# Altium PCB Generic_Axis_Channel_Blade.PcbDoc (part 1 of 3)
Units mm, origin at the board's own origin, x right, y up, seen from the top; angles counter-clockwise.
Board outline 87.5 x 97.62 mm, 4 copper layers (Top Layer 1, L2_GND, L3_PWR, Bottom Layer 1), stack 1.556 mm thick; 166 components, 595 nets, 662 pads, 1674 vias.
Unrouted connection lines stored in the file: 33.
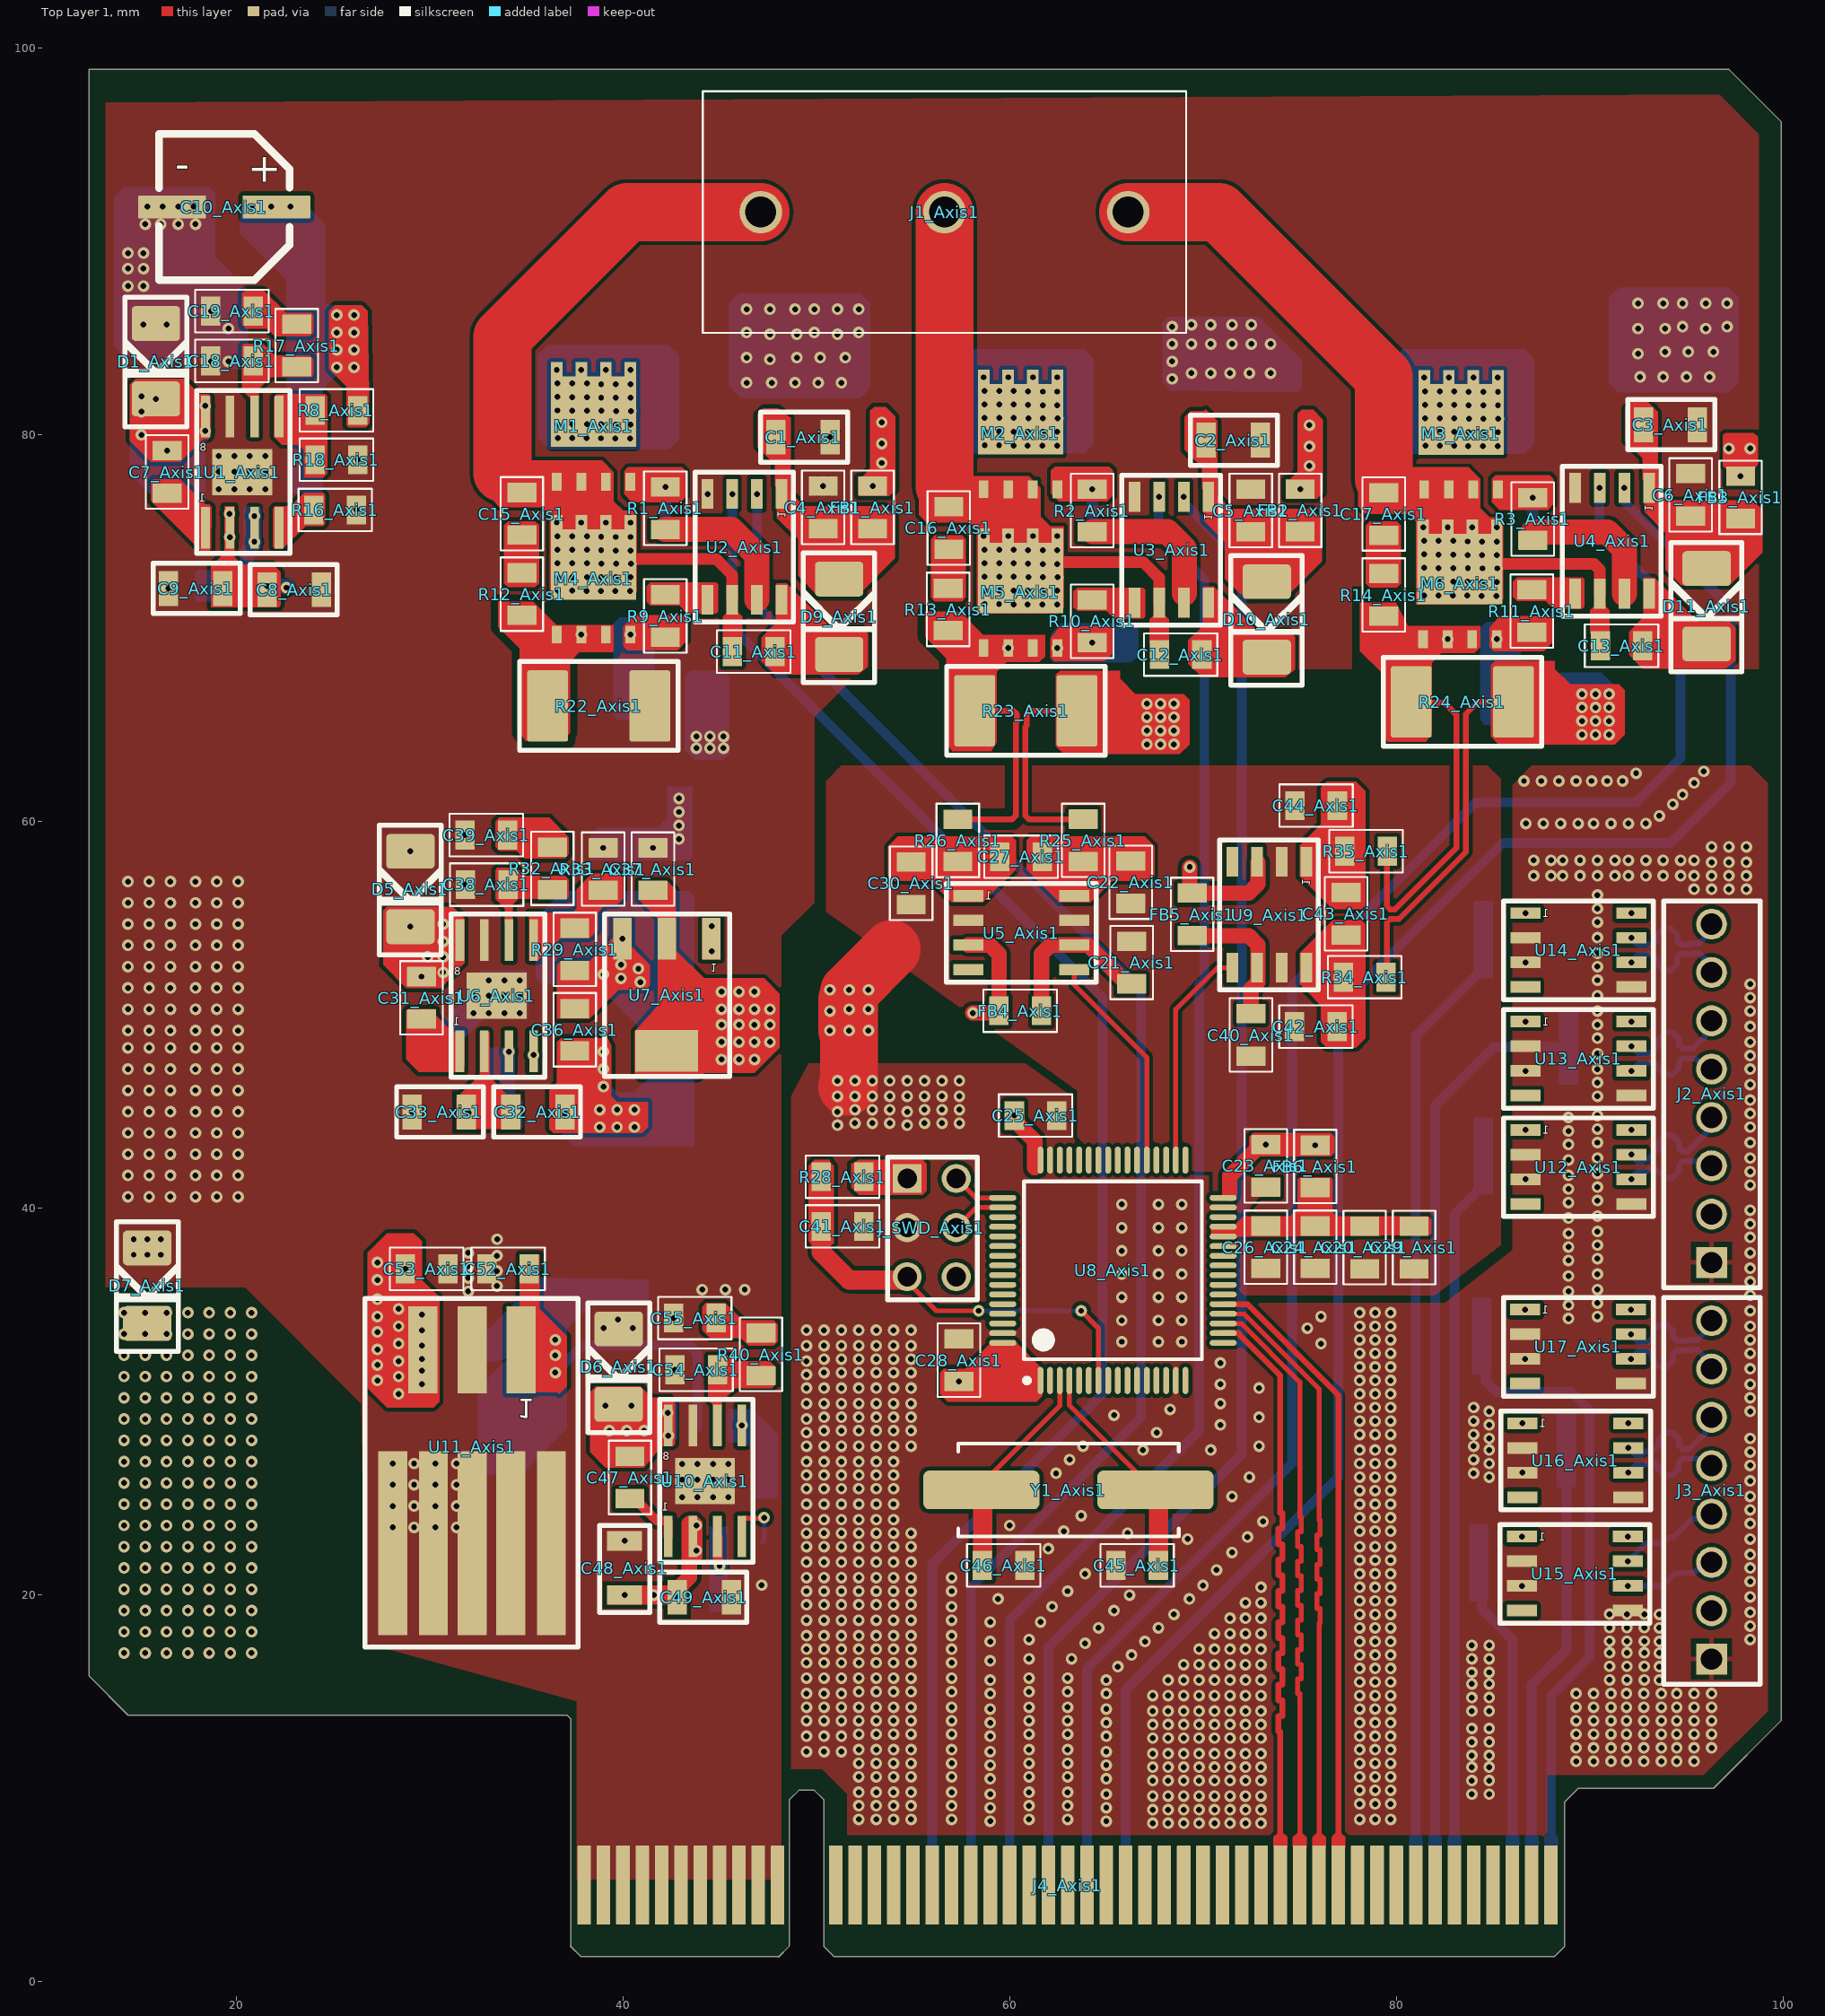
[diagram p0: Top Layer 1 view]
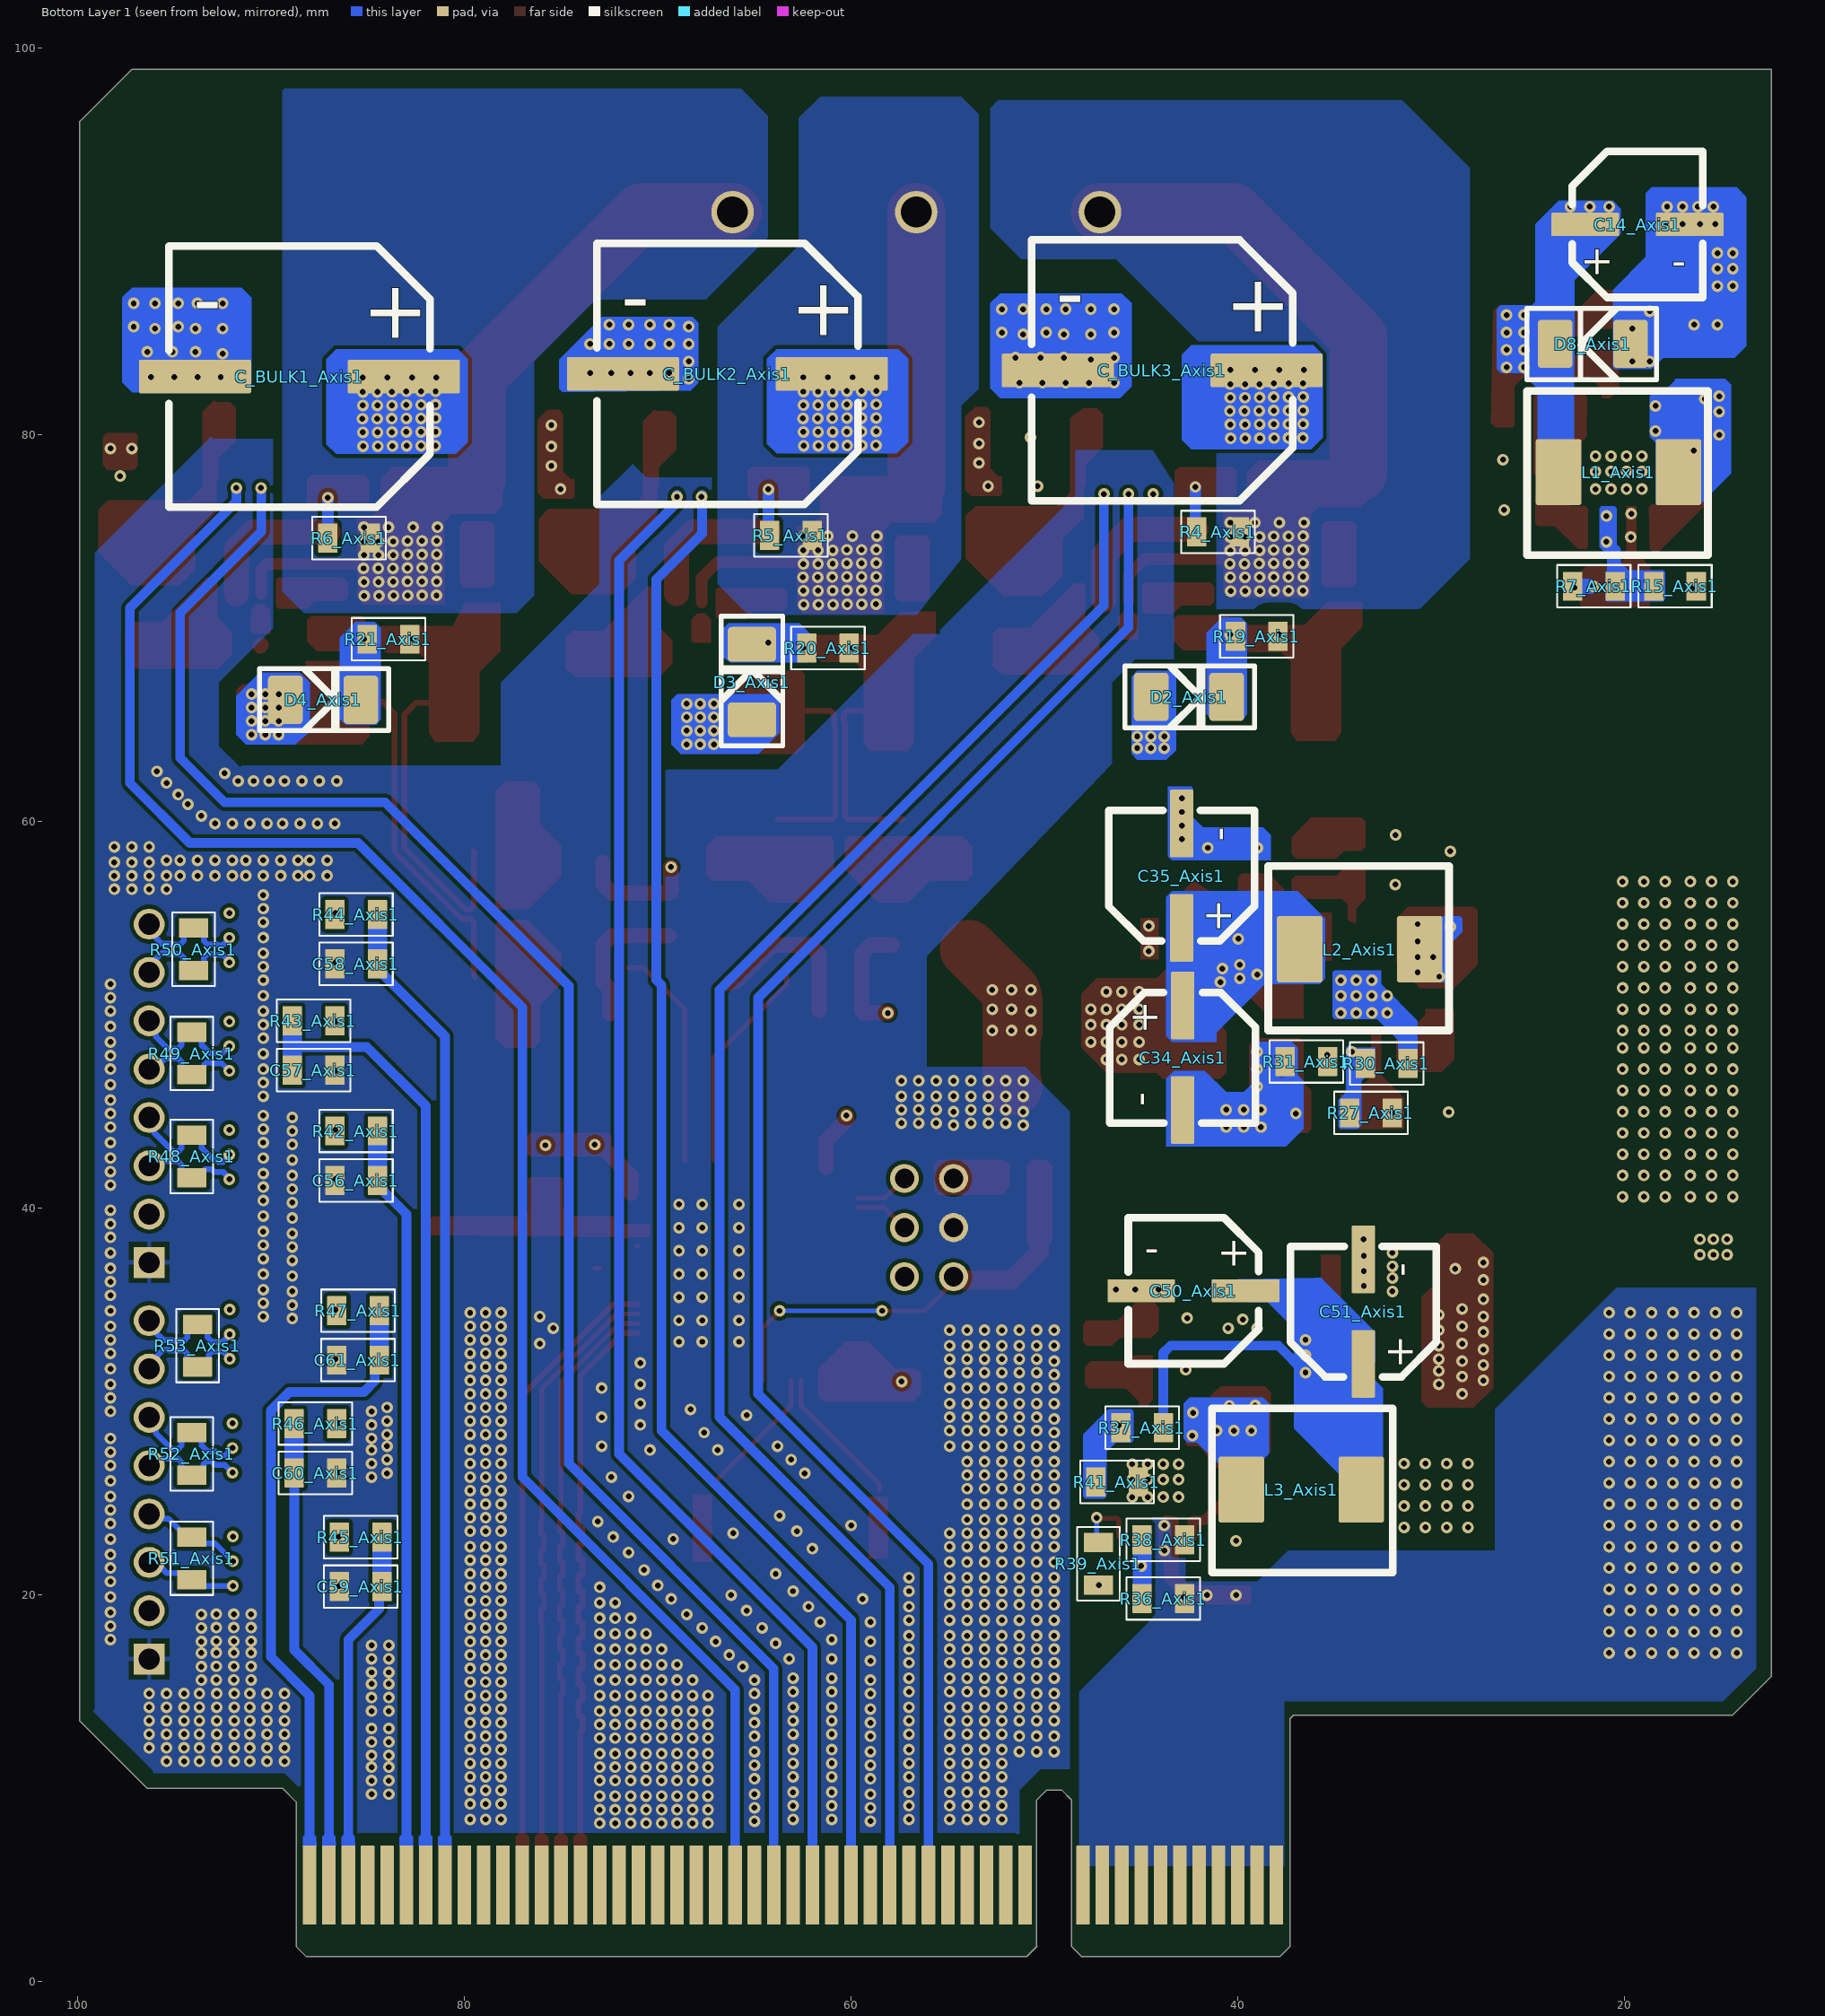
[diagram p1: Bottom Layer 1 view, seen from below]
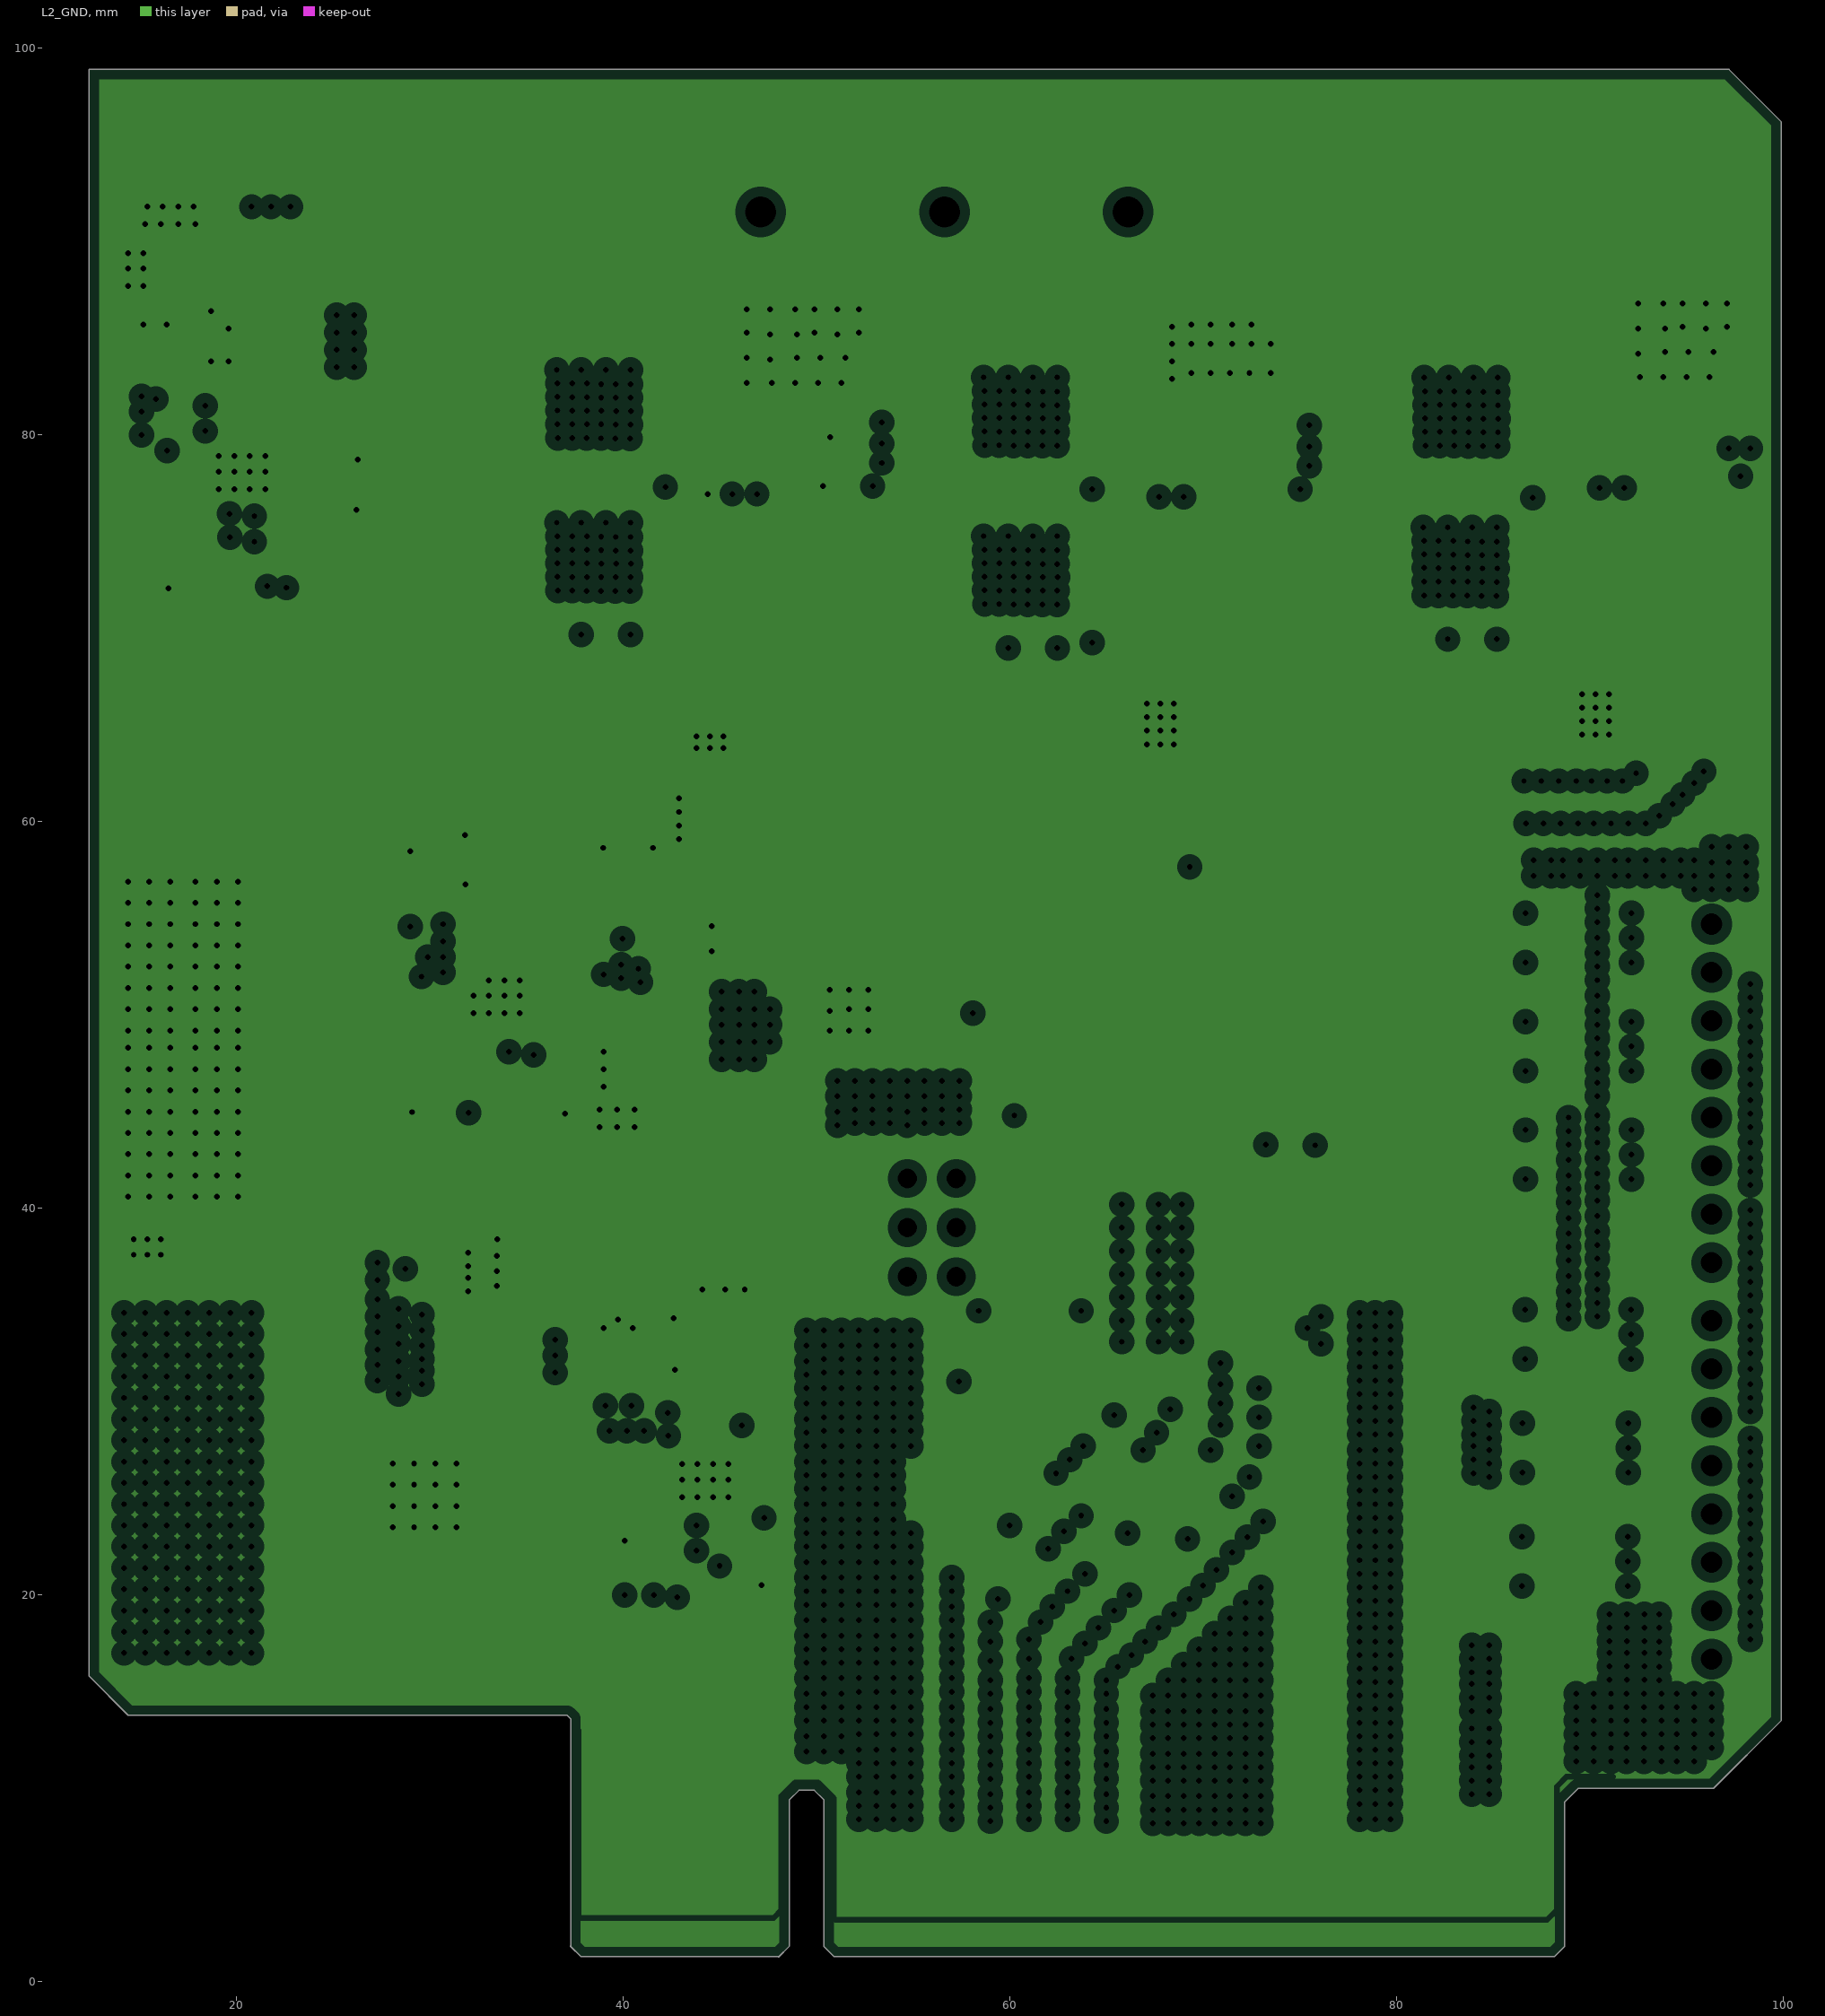
[diagram p2: L2_GND, clearances drawn from the general rule]
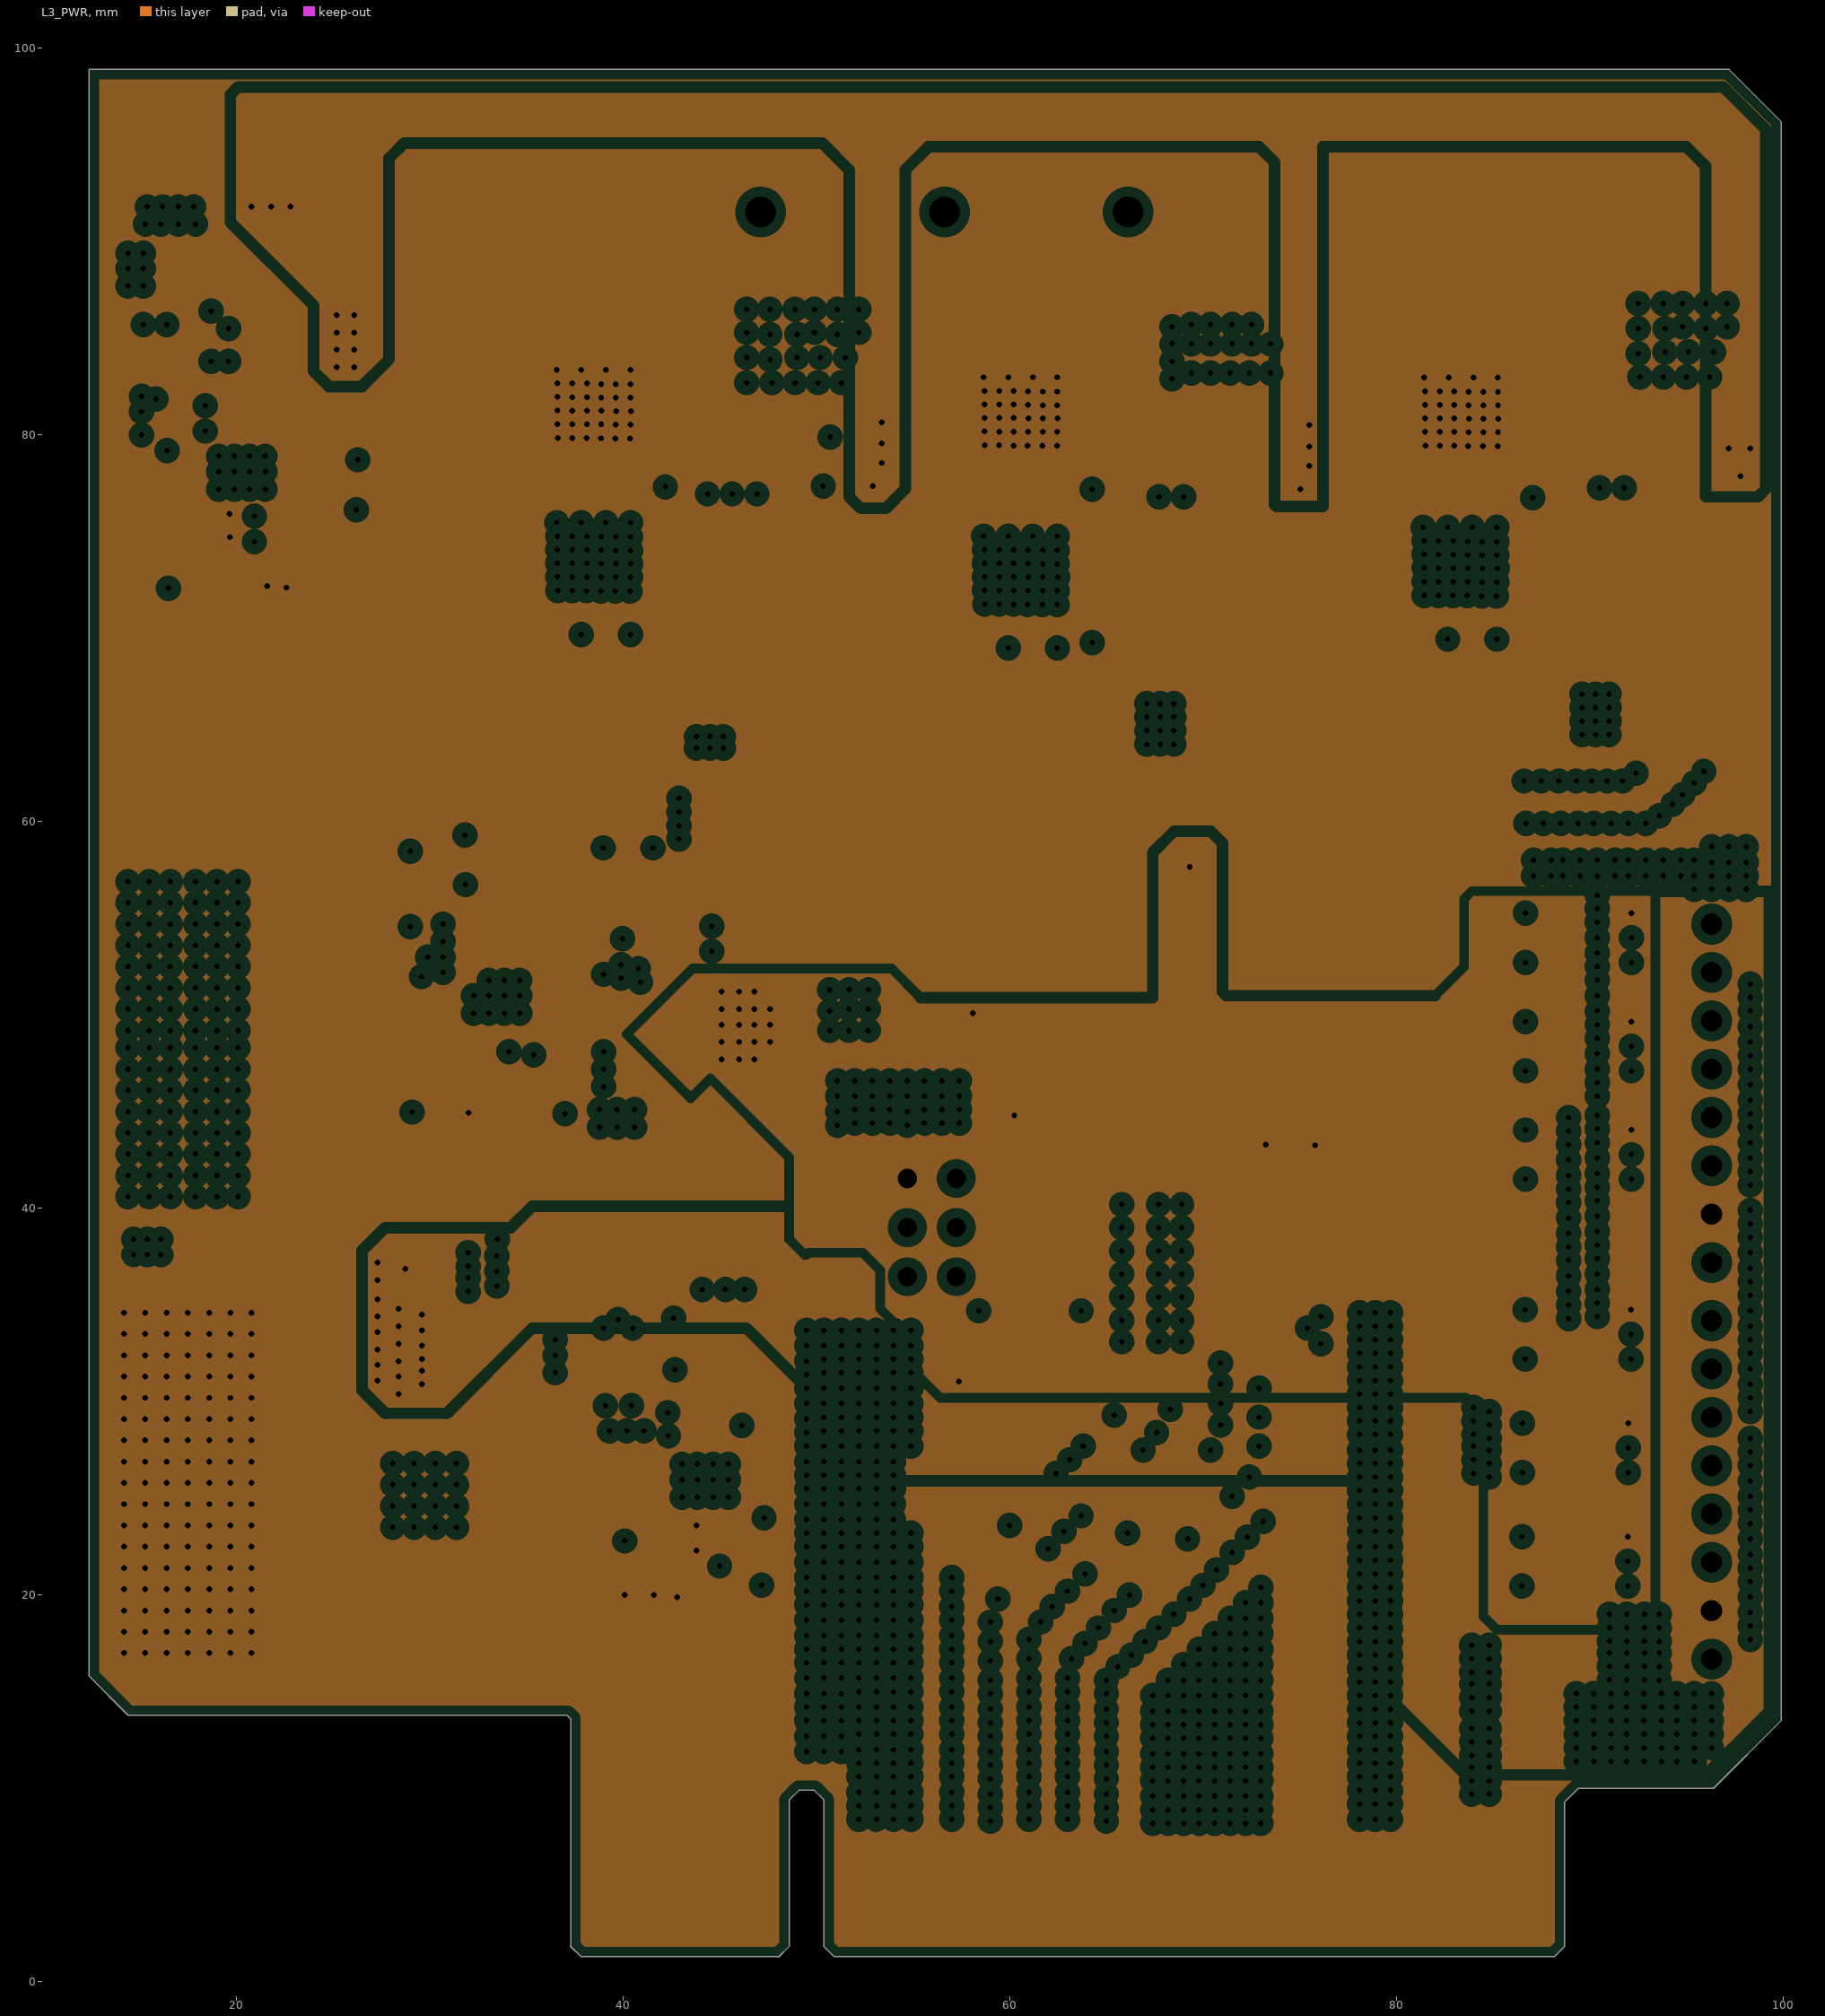
[diagram p3: L3_PWR, clearances drawn from the general rule]

## Layer stack, top to bottom
Top Solder: solder mask 0.0102, Solder Resist, Dk 3.5
Top Layer 1: signal copper 0.035
Dielectric 2: prepreg 0.1999, FR-4, Dk 4.2
L2_GND: plane copper 0.035, net AMP1 IN_Axis1_P
Dielectric 1: dielectric 1.016, FR-4, Dk 4.8
L3_PWR: plane copper 0.035, net (Multiple Nets)
Dielectric 3: prepreg 0.1999, FR-4, Dk 4.2
Bottom Layer 1: signal copper 0.035
Bottom Solder: solder mask 0.0102, Solder Resist, Dk 3.5

## Board outline
48.6,1.828 48.048,1.276 48.023,1.3 37.826,1.3 37.289,1.837 37.298,1.846 37.298,13.602 37.113,13.787 14.413,13.787 12.4,15.8 12.4,98.9 97.203,98.9 99.9,96.203 99.9,13.5 96.4,10 89.4,10 88.7,9.3 88.701,9.299 88.701,1.825 88.169,1.294 88.166,1.296 50.921,1.296 50.921,1.3 50.384,1.836 50.4,1.852 50.4,9.4 49.9,9.9 49.1,9.9 48.6,9.4

## Design rules (kind name [scope] priority, off if disabled: settings)
Clearance Clearance_Analog_vs_PowerOutput [InNetClass('ANALOG') vs InNetClass('POWER_OUTPUT')] p1: gap=1 ignorepadtopadclearanceinfootprint=FALSE
Clearance Clearance_PowerOutput_vs_Digital [InNetClass('POWER_OUTPUT') vs InNetClass('HIGH_SPEED')] p2: gap=0.5 ignorepadtopadclearanceinfootprint=FALSE
Clearance Clearance_Analog_Global [InNetClass('ANALOG') vs InNetClass('All Nets')] p3: gap=0.4 ignorepadtopadclearanceinfootprint=FALSE
Clearance Clearance_Global [All] p4: gap=0.2 ignorepadtopadclearanceinfootprint=FALSE
ComponentClearance [All] p1: gap=0.254 collisioncheckmode=3 verticalgap=0.3 showdistances=FALSE
DiffPairsRouting DiffPairs_Encoder [InDifferentialPairClass('All Differential Pairs')] p1: maxlimit=0.3 minlimit=0.15 mostfreqgap=0.2 toplayer_minwidth=0.15 toplayer_maxwidth=0.3 toplayer_prefwidth=0.2 bottomlayer_minwidth=0.15 bottomlayer_maxwidth=0.3 bottomlayer_prefwidth=0.2 maxuncoupledlength=12.7
MatchedLengths MatchedLength_SPI [InNetClass('SPI')] p1: tolerance=2 checknetsindiffpair=FALSE checkdiffpairvsdiffpair=TRUE checkxsignals=TRUE checkothers=TRUE
PlaneClearance [All] p1: clearance=0.508
PlaneConnect "Termal vias" [All] p1: pad.planeconnectstyle=Relief pad.reliefexpansion=0.508 pad.reliefentries=4 pad.reliefconductorwidth=0.254 pad.reliefairgap=0.254 via.planeconnectstyle=Direct via.reliefexpansion=0.508 via.reliefentries=4 via.reliefconductorwidth=0.254 via.reliefairgap=0.254
PolygonConnect GND [InNet('DGND')] p1: connectstyle=Direct reliefconductorwidth=0.254 reliefentries=4 polygonreliefangle="90 Angle" airgapwidth=0.254
PolygonConnect PolyConnect_SuperSO8 [HasFootprint('SuperSO8')] p2: connectstyle=Direct reliefconductorwidth=0.254 reliefentries=4 polygonreliefangle="90 Angle" airgapwidth=0.254
PolygonConnect PolyConnect_HSOIC-8-DDA [HasFootprint('HSOIC-8-DDA')] p3: connectstyle=Direct reliefconductorwidth=0.254 reliefentries=4 polygonreliefangle="90 Angle" airgapwidth=0.254
PolygonConnect PolyConnect_SOIC-8_PAD [HasFootprint('SOIC-8_PowerPAD_DDA')] p4: connectstyle=Direct reliefconductorwidth=0.254 reliefentries=4 polygonreliefangle="90 Angle" airgapwidth=0.254
PolygonConnect PolyConnect_Relief [All] p5: connectstyle=Relief reliefconductorwidth=0.5 reliefentries=4 polygonreliefangle="90 Angle" airgapwidth=0.3
RoutingVias Via_Power [InNetClass('POWER')] p1: holewidth=0.5 width=1 viastyle="Through Hole" minholewidth=0.4 minwidth=0.8 maxholewidth=0.8 maxwidth=1.5
RoutingVias Via_Power_Output [InNetClass('POWER_OUTPUT')] p2: holewidth=0.5 width=1 viastyle="Through Hole" minholewidth=0.4 minwidth=0.8 maxholewidth=0.8 maxwidth=1.5
RoutingVias Via_Signal [All] p3: holewidth=0.3 width=0.6 viastyle="Through Hole" minholewidth=0.25 minwidth=0.5 maxholewidth=0.5 maxwidth=1
SolderMaskExpansion [All] p1: expansion=0.102 istentingtop=FALSE
SupplyNets "Schematic Supply Nets_11" [InNet('AMP1 IN_Axis1_P')] p1: voltage=0.000
SupplyNets "Schematic Supply Nets_3" [InNet('MAIN VCC')] p2: voltage=0.000
SupplyNets "Schematic Supply Nets_5" [InNet('DGND')] p3: voltage=0.000
SupplyNets "Schematic Supply Nets_6" [InNet('AGND')] p4: voltage=0.000
SupplyNets "Schematic Supply Nets_4" [InNet('+3.3')] p5: voltage=0.000
SupplyNets "Schematic Supply Nets_1" [InNet('+12')] p6: voltage=0.000
SupplyNets "Schematic Supply Nets" [InNet('+5')] p7: voltage=0.000
Width Width_Power_Output [InNetClass('POWER_OUTPUT')] p1: maxlimit=5 minlimit=1.5 preferedwidth=2
Width Width_Power [InNetClass('POWER')] p2: maxlimit=3 minlimit=0.8 preferedwidth=1.5
Width Width_Analog [InNetClass('ANALOG')] p3: maxlimit=0.8 minlimit=0.25 preferedwidth=0.4
Width Width_Digital [InNetClass('HIGH_SPEED')] p4: maxlimit=0.5 minlimit=0.15 preferedwidth=0.2
26 further rules are at their usual default settings.

## Classes and differential pairs
net class SPI: CS_Axis1 CS_Axis2 CS_Axis3 CS_Axis4 CS_Axis5 CS_Axis6 MISO_Axis1 MISO_Axis2 MISO_Axis3 MISO_Axis4 MISO_Axis5 MISO_Axis6 MOSI_Axis1 MOSI_Axis2 MOSI_Axis3 MOSI_Axis4 MOSI_Axis5 MOSI_Axis6 NetJ_SWD_Axis1_2 NetJ_SWD_Axis1_4 SCK_Axis1 SCK_Axis2 SCK_Axis3 SCK_Axis4 SCK_Axis5 SCK_Axis6
net class POWER_OUTPUT: Va_Axis1 Va_Axis2 Va_Axis3 Va_Axis4 Va_Axis5 Va_Axis6 Vb_Axis1 Vb_Axis2 Vb_Axis3 Vb_Axis4 Vb_Axis5 Vb_Axis6 Vc_Axis1 Vc_Axis2 Vc_Axis3 Vc_Axis4 Vc_Axis5 Vc_Axis6
net class ANALOG: "AMP1 IN_Axis1_N" NetM4_Axis1_1
net class HIGH_SPEED: A1_Axis1 A1_Axis2 A1_Axis3 A1_Axis4 A1_Axis5 A1_Axis6 A2_Axis1 A2_Axis2 A2_Axis3 A2_Axis4 A2_Axis5 A2_Axis6 B1_Axis1 B1_Axis2 B1_Axis3 B1_Axis4 B1_Axis5 B1_Axis6 B2_Axis1 B2_Axis2 B2_Axis3 B2_Axis4 B2_Axis5 B2_Axis6 MISO_Axis1 MISO_Axis2 MISO_Axis3 MISO_Axis4 MISO_Axis5 MISO_Axis6 MOSI_Axis1 MOSI_Axis2 MOSI_Axis3 MOSI_Axis4 MOSI_Axis5 MOSI_Axis6 NetJ_SWD_Axis1_2 NetJ_SWD_Axis1_4 "PWM AH_Axis1" "PWM AH_Axis2" "PWM AH_Axis3" "PWM AH_Axis4" "PWM AH_Axis5" "PWM AH_Axis6" "PWM AL_Axis1" "PWM AL_Axis2" "PWM AL_Axis3" "PWM AL_Axis4" "PWM AL_Axis5" "PWM AL_Axis6" "PWM BH_Axis1" "PWM BH_Axis2" "PWM BH_Axis3" "PWM BH_Axis4" "PWM BH_Axis5" "PWM BH_Axis6" "PWM BL_Axis1" "PWM BL_Axis2" "PWM BL_Axis3" "PWM BL_Axis4" "PWM BL_Axis5" "PWM BL_Axis6" "PWM CH_Axis1" "PWM CH_Axis2" "PWM CH_Axis3" "PWM CH_Axis4" "PWM CH_Axis5" "PWM CH_Axis6" "PWM CL_Axis1" "PWM CL_Axis2" "PWM CL_Axis3" "PWM CL_Axis4" "PWM CL_Axis5" "PWM CL_Axis6" SCK_Axis1 SCK_Axis2 SCK_Axis3 SCK_Axis4 SCK_Axis5 SCK_Axis6 Z1_Axis1 Z1_Axis2 Z1_Axis3 Z1_Axis4 Z1_Axis5 Z1_Axis6 Z2_Axis1 Z2_Axis2 Z2_Axis3 Z2_Axis4 Z2_Axis5 Z2_Axis6
net class POWER: +3.3 +5 +12 "MAIN VCC"
channel class Axis_Channel: Axis1 Axis2 Axis3 Axis4 Axis5 Axis6
component class Axis6: C_BULK?_Axis6
component class Axis5: C_BULK?_Axis5
component class Axis4: C_BULK?_Axis4
component class Axis3: C_BULK?_Axis3
component class Axis2: C_BULK?_Axis2
differential pair Z2_Axis6: +Z2_Axis6_P -Z2_Axis6_N
differential pair Z2_Axis5: +Z2_Axis5_P -Z2_Axis5_N
differential pair Z2_Axis4: +Z2_Axis4_P -Z2_Axis4_N
differential pair Z2_Axis3: +Z2_Axis3_P -Z2_Axis3_N
differential pair Z2_Axis2: +Z2_Axis2_P -Z2_Axis2_N
differential pair Z2_Axis1: +Z2_Axis1_P -Z2_Axis1_N
differential pair Z1_Axis6: +Z1_Axis6_P -Z1_Axis6_N
differential pair Z1_Axis5: +Z1_Axis5_P -Z1_Axis5_N
differential pair Z1_Axis4: +Z1_Axis4_P -Z1_Axis4_N
differential pair Z1_Axis3: +Z1_Axis3_P -Z1_Axis3_N
differential pair Z1_Axis2: +Z1_Axis2_P -Z1_Axis2_N
differential pair Z1_Axis1: +Z1_Axis1_P -Z1_Axis1_N
differential pair B2_Axis6: +B2_Axis6_P -B2_Axis6_N
differential pair B2_Axis5: +B2_Axis5_P -B2_Axis5_N
differential pair B2_Axis4: +B2_Axis4_P -B2_Axis4_N
differential pair B2_Axis3: +B2_Axis3_P -B2_Axis3_N
differential pair B2_Axis2: +B2_Axis2_P -B2_Axis2_N
differential pair B2_Axis1: +B2_Axis1_P -B2_Axis1_N
differential pair B1_Axis6: +B1_Axis6_P -B1_Axis6_N
differential pair B1_Axis5: +B1_Axis5_P -B1_Axis5_N
differential pair B1_Axis4: +B1_Axis4_P -B1_Axis4_N
differential pair B1_Axis3: +B1_Axis3_P -B1_Axis3_N
differential pair B1_Axis2: +B1_Axis2_P -B1_Axis2_N
differential pair B1_Axis1: +B1_Axis1_P -B1_Axis1_N
differential pair A2_Axis6: +A2_Axis6_P -A2_Axis6_N
differential pair A2_Axis5: +A2_Axis5_P -A2_Axis5_N
differential pair A2_Axis4: +A2_Axis4_P -A2_Axis4_N
differential pair A2_Axis3: +A2_Axis3_P -A2_Axis3_N
differential pair A2_Axis2: +A2_Axis2_P -A2_Axis2_N
differential pair A2_Axis1: +A2_Axis1_P -A2_Axis1_N
differential pair A1_Axis6: +A1_Axis6_P -A1_Axis6_N
differential pair A1_Axis5: +A1_Axis5_P -A1_Axis5_N
differential pair A1_Axis4: +A1_Axis4_P -A1_Axis4_N
differential pair A1_Axis3: +A1_Axis3_P -A1_Axis3_N
differential pair A1_Axis2: +A1_Axis2_P -A1_Axis2_N
differential pair A1_Axis1: +A1_Axis1_P -A1_Axis1_N

## Components (designator, comment, footprint, x,y, rotation, side; value= is the part's Value field where it differs from the comment)
C1_Axis1 "Capacitor 1206" 1206 49.32,79.882 r0 top value=4.7u (schematic designator C1)
C2_Axis1 "Capacitor 1206" 1206 71.559,79.731 r0 top value=4.7u (schematic designator C2)
C3_Axis1 "Capacitor 1206" 1206 94.173,80.526 r0 top value=4.7u (schematic designator C3)
C4_Axis1 "Capacitor 0805" 0805 50.358,76.249 r90 top value=100n (schematic designator C4)
C5_Axis1 "Capacitor 0805" 0805 72.47,76.09 r90 top value=100n (schematic designator C5)
C6_Axis1 "Capacitor 0805" 0805 95.22,76.895 r90 top value=100n (schematic designator C6)
C7_Axis1 "Alum SMD Cap" 0805 16.427,78.083 r270 top value=0.1u (schematic designator C7)
C8_Axis1 "Alum SMD Cap" 1206 23.011,71.996 r180 top value=2.2u (schematic designator C8)
C9_Axis1 "Capacitor 1206" 1206 17.903,72.058 r0 top value=2.2u (schematic designator C9)
C10_Axis1 "Alum SMD Cap" "ECAP D6.3xL7.7mm" 19.379,91.787 r180 top value=47u (schematic designator C10)
C11_Axis1 "Capacitor 0805" 0805 46.765,68.791 r0 top value=220n (schematic designator C11)
C12_Axis1 "Capacitor 0805" 0805 68.841,68.642 r0 top value=220n (schematic designator C12)
C13_Axis1 "Capacitor 0805" 0805 91.646,69.101 r0 top value=220n (schematic designator C13)
C14_Axis1 "Alum SMD Cap" "ECAP D6.3xL7.7mm" 19.329,90.888 r180 bottom value=47u (schematic designator C14)
C15_Axis1 "Capacitor 0805" 0805 34.773,75.919 r270 top value=1n (schematic designator C15)
C16_Axis1 "Capacitor 0805" 0805 56.852,75.191 r270 top value=1n (schematic designator C16)
C17_Axis1 "Capacitor 0805" 0805 79.345,75.911 r270 top value=1n (schematic designator C17)
C18_Axis1 "Capacitor" 0805 19.78,83.823 r180 top value=39p (schematic designator C18)
C19_Axis1 "Capacitor 0805" 0805 19.78,86.408 r180 top value=6800p (schematic designator C19)
C20_Axis1 "Capacitor 0805" 0805 78.361,37.973 r270 top value=100n (schematic designator C20)
C21_Axis1 "Cap" 0805 66.304,52.713 r90 top (schematic designator C21)
C22_Axis1 "Cap" 0805 66.269,56.867 r270 top (schematic designator C22)
C23_Axis1 "Capacitor 0805" 0805 73.253,42.195 r90 top value=100n (schematic designator C23)
C24_Axis1 "Capacitor 0805" 0805 75.807,37.985 r90 top value=1u (schematic designator C24)
C25_Axis1 "Capacitor 0805" 0805 61.343,44.795 r180 top value=100n (schematic designator C25)
C26_Axis1 "Capacitor 0805" 0805 73.253,37.985 r270 top value=1u (schematic designator C26)
C27_Axis1 "Cap" 0805 60.592,58.182 r0 top (schematic designator C27)
C28_Axis1 "Capacitor 0805" 0805 57.381,32.144 r270 top value=100n (schematic designator C28)
C29_Axis1 "Capacitor 0805" 0805 80.915,37.976 r270 top value=100n (schematic designator C29)
C30_Axis1 "Cap" 0805 54.908,56.815 r90 top (schematic designator C30)
C31_Axis1 "Alum SMD Cap" 0805 29.586,50.885 r270 top value=0.1u (schematic designator C31)
C32_Axis1 "Alum SMD Cap" 1206 35.608,44.979 r180 top value=2.2u (schematic designator C32)
C33_Axis1 "Capacitor 1206" 1206 30.495,44.979 r0 top value=2.2u (schematic designator C33)
C34_Axis1 "Alum SMD Cap" "ECAP D6.3xL7.7mm" 42.854,47.789 r270 bottom value=47u (schematic designator C34)
C35_Axis1 "Alum SMD Cap" "ECAP D6.3xL7.7mm" 42.904,57.202 r90 bottom value=47u (schematic designator C35)
C36_Axis1 "Capacitor 0805" 0805 37.509,49.236 r90 top value=0.33u (schematic designator C36)
C37_Axis1 "Capacitor 0805" 0805 41.55,57.544 r270 top value=1u (schematic designator C37)
C38_Axis1 "SMD Cap" 0805 32.952,56.743 r180 top value=39p (schematic designator C38)
C39_Axis1 "Capacitor 0805" 0805 32.94,59.309 r180 top value=6800p (schematic designator C39)
C40_Axis1 "Cap" 0805 72.482,48.967 r270 top (schematic designator C40)
C41_Axis1 "Capacitor 0805" 0805 51.361,39.065 r180 top value=100n (schematic designator C41)
C42_Axis1 "Cap" 0805 75.841,49.402 r180 top value=33p (schematic designator C42)
C43_Axis1 "Cap" 0805 77.402,55.234 r270 top (schematic designator C43)
C44_Axis1 "Cap" 0805 75.848,60.826 r0 top (schematic designator C44)
C45_Axis1 "Capacitor 0805" 0805 66.591,21.53 r0 top value=22p (schematic designator C45)
C46_Axis1 "Capacitor 0805" 0805 59.692,21.53 r180 top value=22p (schematic designator C46)
C47_Axis1 "Alum SMD Cap" 0805 40.363,26.081 r270 top value=0.1u (schematic designator C47)
C48_Axis1 "Alum SMD Cap" 1206 40.086,21.399 r270 top value=2.2u (schematic designator C48)
C49_Axis1 "Capacitor 1206" 1206 44.208,19.884 r180 top value=2.2u (schematic designator C49)
C50_Axis1 "Alum SMD Cap" "ECAP D6.3xL7.7mm" 42.29,35.736 r0 bottom value=47u (schematic designator C50)
C51_Axis1 "Alum SMD Cap" "ECAP D6.3xL7.7mm" 33.51,34.66 r90 bottom value=47u (schematic designator C51)
C52_Axis1 "Capacitor 0805" 0805 34.061,36.872 r0 top value=0.33u (schematic designator C52)
C53_Axis1 "Capacitor 0805" 0805 29.853,36.872 r180 top value=1u (schematic designator C53)
C54_Axis1 "Alum SMD Cap" 0805 43.786,31.648 r180 top value=39p (schematic designator C54)
C55_Axis1 "Capacitor 0805" 0805 43.717,34.326 r180 top value=6800p (schematic designator C55)
C56_Axis1 "Capacitor 0805" 0805 85.6,41.446 r180 bottom value=33p (schematic designator C56)
C57_Axis1 "Capacitor 0805" 0805 87.8,47.146 r0 bottom value=33p (schematic designator C57)
C58_Axis1 "Capacitor 0805" 0805 85.6,52.646 r180 bottom value=33p (schematic designator C58)
C59_Axis1 "Capacitor 0805" 0805 85.366,20.437 r180 bottom value=33p (schematic designator C59)
C60_Axis1 "Capacitor 0805" 0805 87.7,26.317 r0 bottom value=33p (schematic designator C60)
C61_Axis1 "Capacitor 0805" 0805 85.501,32.151 r180 bottom value=33p (schematic designator C61)
C_BULK1_Axis1 "Alum SMD Cap" "ECAP 12.5x16.5" 88.529,83.023 r0 bottom value=220u (schematic designator C_BULK1)
C_BULK2_Axis1 "Alum SMD Cap" "ECAP 12.5x16.5" 66.399,83.161 r0 bottom value=220u (schematic designator C_BULK2)
C_BULK3_Axis1 "Alum SMD Cap" "ECAP 12.5x16.5" 43.907,83.336 r0 bottom value=220u (schematic designator C_BULK3)
D1_Axis1 "Schottky Diod" SMB 15.849,83.814 r270 top value=5V (schematic designator D1)
D2_Axis1 "Supressor Dual" SMB 42.53,66.451 r180 bottom (schematic designator D2)
D3_Axis1 "Supressor Dual" SMB 65.128,67.222 r90 bottom (schematic designator D3)
D4_Axis1 "Supressor Dual" SMB 87.302,66.304 r180 bottom (schematic designator D4)
D5_Axis1 "Schottky Diod" SMB 29.009,56.516 r270 top value=5V (schematic designator D5)
D6_Axis1 "Schottky Diod" SMB 39.786,31.812 r270 top value=5V (schematic designator D6)
D7_Axis1 "Supressor Dual" SMB 15.4,36 r270 top (schematic designator D7)
D8_Axis1 "Supressor Dual" SMB 21.639,84.707 r0 bottom (schematic designator D8)
D9_Axis1 "Schottky Diod" SMB 51.185,70.596 r270 top value=12V (schematic designator D9)
D10_Axis1 "Schottky Diod" SMB 73.297,70.459 r270 top value=12V (schematic designator D10)
D11_Axis1 "Schottky Diod" SMB 96.047,71.143 r270 top value=12V (schematic designator D11)
FB1_Axis1 "Ferrite Bead" 0805 52.913,76.249 r90 top value=1K (schematic designator FB1)
FB2_Axis1 "Ferrite Bead" 0805 75.024,76.1 r90 top value=1K (schematic designator FB2)
FB3_Axis1 "Ferrite Bead" 0805 97.803,76.774 r90 top value=1K (schematic designator FB3)
FB4_Axis1 "Ferrite Bead" 0805 60.548,50.22 r180 top value=1K (schematic designator FB4)
FB5_Axis1 "Ferrite Bead" 0805 69.435,55.202 r90 top value=1K (schematic designator FB5)
FB6_Axis1 "Ferrite Bead" 0805 75.807,42.162 r270 top value=1K (schematic designator FB6)
J1_Axis1 "DG950-9.5-03P-14" DG950-9.5-03P-14 56.629,91.523 r0 top (schematic designator J1)
J2_Axis1 "JST/MOLEX_8pin" B8B-EH-A-(LF)(SN) 96.324,45.893 r90 top (schematic designator J2)
J3_Axis1 "JST/MOLEX_8pin" B8B-EH-A-(LF)(SN) 96.324,25.385 r90 top (schematic designator J3)
J4_Axis1 "PCIe x8 Edge Connector" MALE_PCI_x8 52.65,2.25 r0 top (schematic designator J4)
J_SWD_Axis1 "HEADER_2x3" HEADER_2x3 56.029,38.589 r0 top (schematic designator J_SWD)
L1_Axis1 "Inductor" MWSA0603S-4R7MT 20.313,78.076 r0 bottom value=4.7u (schematic designator L1)
L2_Axis1 "Inductor" MWSA0603S-4R7MT 33.7,53.4 r0 bottom value=4.7u (schematic designator L2)
L3_Axis1 "Inductor" MWSA0603S-4R7MT 36.718,25.454 r180 bottom value=4.7u (schematic designator L3)
M1_Axis1 "NTMFS3D5N08XT1G" SuperSO8 38.483,80.507 r0 top (schematic designator M1)
M2_Axis1 "NTMFS3D5N08XT1G" SuperSO8 60.562,80.121 r0 top (schematic designator M2)
M3_Axis1 "NTMFS3D5N08XT1G" SuperSO8 83.347,80.103 r0 top (schematic designator M3)
M4_Axis1 "NTMFS3D5N08XT1G" SuperSO8 38.483,72.605 r0 top (schematic designator M4)
M5_Axis1 "NTMFS3D5N08XT1G" SuperSO8 60.562,71.909 r0 top (schematic designator M5)
M6_Axis1 "NTMFS3D5N08XT1G" SuperSO8 83.289,72.365 r0 top (schematic designator M6)
R1_Axis1 "Resistor 0805" 0805 42.194,76.209 r270 top value=20 (schematic designator R1)
R2_Axis1 "Resistor 0805" 0805 64.273,76.09 r270 top value=20 (schematic designator R2)
R3_Axis1 "Resistor 0805" 0805 87.058,75.651 r90 top value=20 (schematic designator R3)
R4_Axis1 "Resistor 0805" 0805 41.02,74.982 r0 bottom value=100K (schematic designator R4)
R5_Axis1 "Resistor 0805" 0805 63.116,74.807 r0 bottom value=100K (schematic designator R5)
R6_Axis1 "Resistor 0805" 0805 85.959,74.669 r0 bottom value=100K (schematic designator R6)
R7_Axis1 "Resistor 0805" 0805 21.59,72.172 r0 bottom value=523K (schematic designator R7)
R8_Axis1 "Resistor 0805" 0805 25.184,81.268 r180 top value=141K (schematic designator R8)
R9_Axis1 "Resistor 0805" 0805 42.194,70.638 r270 top value=10 (schematic designator R9)
R10_Axis1 "Resistor 0805" 0805 64.273,70.365 r270 top value=10 (schematic designator R10)
R11_Axis1 "Resistor 0805" 0805 87,70.888 r270 top value=10 (schematic designator R11)
R12_Axis1 "Resistor 0805" 0805 34.773,71.765 r90 top value=10 (schematic designator R12)
R13_Axis1 "Resistor 0805" 0805 56.821,70.974 r90 top value=10 (schematic designator R13)
R14_Axis1 "Resistor 0805" 0805 79.345,71.721 r90 top value=10 (schematic designator R14)
R15_Axis1 "Resistor 0805" 0805 17.392,72.172 r0 bottom value=84.5K (schematic designator R15)
R16_Axis1 "Resistor 0805" 0805 25.124,76.117 r180 top value=140K (schematic designator R16)
R17_Axis1 "Resistor 0805" 0805 23.134,84.623 r90 top value=13.0K (schematic designator R17)
R18_Axis1 "Resistor 0805" 0805 25.184,78.714 r180 top value=10.2K (schematic designator R18)
R19_Axis1 "Resistor 0805" 0805 39.02,69.582 r0 bottom value=100K (schematic designator R19)
R20_Axis1 "Resistor 0805" 0805 61.197,68.979 r0 bottom value=100K (schematic designator R20)
R21_Axis1 "Resistor 0805" 0805 83.924,69.435 r0 bottom value=100K (schematic designator R21)
R22_Axis1 "Current Shunt" 2512 38.752,65.982 r180 top value="5 mOhm" (schematic designator R22)
R23_Axis1 "Current Shunt" 2512 60.839,65.734 r180 top value="5 mOhm" (schematic designator R23)
R24_Axis1 "Current Shunt" 2512 83.42,66.19 r180 top value="5 mOhm" (schematic designator R24)
R25_Axis1 "Resistor" 0805 63.807,59.029 r270 top value=120 (schematic designator R25)
R26_Axis1 "Resistor" 0805 57.321,59.026 r270 top value=120 (schematic designator R26)
R27_Axis1 "Resistor 0805" 0805 33.116,44.935 r180 bottom value=523K (schematic designator R27)
R28_Axis1 "Resistor 0805" 0805 51.361,41.634 r0 top value=10K (schematic designator R28)
R29_Axis1 "Resistor 0805" 0805 37.508,53.39 r90 top value=53.6K (schematic designator R29)
R30_Axis1 "Resistor 0805" 0805 32.301,47.489 r0 bottom value=84.5K (schematic designator R30)
R31_Axis1 "Resistor 0805" 0805 36.455,47.596 r180 bottom value=140K (schematic designator R31)
R32_Axis1 "Resistor 0805" 0805 36.351,57.583 r90 top value=13.0K (schematic designator R32)
R33_Axis1 "Resistor 0805" 0805 38.982,57.544 r270 top value=10.2K (schematic designator R33)
R34_Axis1 "Resistor" 0805 78.368,51.956 r180 top value=120 (schematic designator R34)
R35_Axis1 "Resistor" 0805 78.438,58.468 r180 top value=120 (schematic designator R35)
R36_Axis1 "Resistor 0805" 0805 43.853,19.823 r180 bottom value=523K (schematic designator R36)
R37_Axis1 "Resistor 0805" 0805 44.949,28.652 r0 bottom value=91K (schematic designator R37)
R38_Axis1 "Resistor 0805" 0805 43.853,22.861 r0 bottom value=84.5K (schematic designator R38)
R39_Axis1 "Resistor 0805" 0805 47.207,21.616 r90 bottom value=140K (schematic designator R39)
R40_Axis1 "Resistor 0805" 0805 47.14,32.449 r90 top value=13.0K (schematic designator R40)
R41_Axis1 "Resistor 0805" 0805 46.249,25.852 r0 bottom value=10.2K (schematic designator R41)
R42_Axis1 "Resistor 0805" 0805 85.6,44 r180 bottom value=330 (schematic designator R42)
R43_Axis1 "Resistor 0805" 0805 87.8,49.7 r0 bottom value=330 (schematic designator R43)
R44_Axis1 "Resistor 0805" 0805 85.6,55.2 r180 bottom value=330 (schematic designator R44)
R45_Axis1 "Resistor 0805" 0805 85.366,22.991 r180 bottom value=330 (schematic designator R45)
R46_Axis1 "Resistor 0805" 0805 87.704,28.871 r0 bottom value=330 (schematic designator R46)
R47_Axis1 "Resistor 0805" 0805 85.496,34.705 r180 bottom value=330 (schematic designator R47)
R48_Axis1 "Resistor" 0805 94.1,42.683 r90 bottom value=120 (schematic designator R48)
R49_Axis1 "Resistor" 0805 94.1,48.009 r90 bottom value=120 (schematic designator R49)
R50_Axis1 "Resistor" 0805 94,53.4 r90 bottom value=120 (schematic designator R50)
R51_Axis1 "Resistor" 0805 94.1,21.9 r90 bottom value=120 (schematic designator R51)
R52_Axis1 "Resistor" 0805 94.1,27.3 r90 bottom value=120 (schematic designator R52)
R53_Axis1 "Resistor" 0805 93.8,32.9 r90 bottom value=120 (schematic designator R53)
U1_Axis1 "TPS54360BDDAR" HSOIC-8-DDA 20.313,78.076 r0 top (schematic designator U1)
U2_Axis1 "IRS21867STRPBF" SOIC-8 46.277,74.197 r270 top (schematic designator U2)
U3_Axis1 "IRS21867STRPBF" SOIC-8 68.354,74.048 r270 top (schematic designator U3)
U4_Axis1 "IRS21867STRPBF" SOIC-8 91.139,74.507 r270 top (schematic designator U4)
U5_Axis1 "INA240A1DR" SOIC-8 60.613,54.246 r0 top (schematic designator U5)
U6_Axis1 "TPS54360BDDAR" HSOIC-8-DDA 33.472,50.997 r0 top (schematic designator U6)
U7_Axis1 "TLV1117-33" SOT-223 42.271,51.038 r180 top (schematic designator U7)
U8_Axis1 "STM32G431RBT6" LQFP-64_10x10_P0.5 65.343,36.795 r0 top (schematic designator U8)
U9_Axis1 "INA240A1DR" SOIC-8 73.417,55.173 r270 top (schematic designator U9)
U10_Axis1 "TPS54360BDDAR" HSOIC-8-DDA 44.249,25.902 r0 top (schematic designator U10)
U11_Axis1 "LM7805" TO-263-3 32.198,27.681 r180 top (schematic designator U11)
U12_Axis1 "SN65HVD75DR" SOIC-8 89.429,42.127 r0 top (schematic designator U12)
U13_Axis1 "SN65HVD75DR" SOIC-8 89.429,47.735 r0 top (schematic designator U13)
U14_Axis1 "SN65HVD75DR" SOIC-8 89.429,53.343 r0 top (schematic designator U14)
U15_Axis1 "SN65HVD75DR" SOIC-8 89.24,21.096 r0 top (schematic designator U15)
U16_Axis1 "SN65HVD75DR" SOIC-8 89.27,26.959 r0 top (schematic designator U16)
U17_Axis1 "SN65HVD75DR" SOIC-8 89.41,32.835 r0 top (schematic designator U17)
Y1_Axis1 "OSC" hc-49sm 63.042,25.434 r180 top value="8 MHz" (schematic designator Y1)

## Footprints (in the part's own frame and the unit in brackets; to place one, negate y for a bottom-side part, rotate by r counter-clockwise, add the part's x,y. Pads: shape width x height; smd on the part's side, far side on the other; paste and mask are expansions set on the pad)
0805 [mm]
  rrect4% 1x1.5 smd: 1(-1.1,0) 2(1.1,0)
  silkscreen extent -1.9,-1.1 1.9,1.1
1206 [mm]
  rect 1x1.8 smd: 1(-1.4,0) 2(1.4,0)
  silkscreen extent -2.2,-1.3 2.3,1.3
2512 [mm] "Shunt"
  rrect10% 2.11x3.68 smd: 1(-2.645,0) 2(2.645,0)
  silkscreen extent -4.1,-2.3 4.1,2.3
B8B-EH-A-(LF)(SN) [mm] "M-JST 8 pin"
  rect 1.6x1.6 hole 1.1: 1(-8.694,0.024)
  round 1.6 hole 1.1: 2(-6.194,0.024) 3(-3.694,0.024) 4(-1.194,0.024) 5(1.306,0.024) 6(3.806,0.024) 7(6.306,0.024) 8(8.806,0.024)
  silkscreen extent -10,-2.5 10,2.5
DG950-9.5-03P-14 [mm]
  round 2.2 hole 1.6: 1(-9.5,0) 2(0,0) 3(9.5,0)
  silkscreen extent -12.5,-6.25 12.5,6.25
"ECAP 12.5x16.5" [mm]
  rrect10% 5.8x1.75 smd: 1(-5.4,0) 2(5.4,0)
  silkscreen extent -6.75,-6.75 6.75,6.75
"ECAP D6.3xL7.7mm" [mm]
  rrect10% 3.5x1.2 smd: 1(-2.7,0) 2(2.7,0)
  silkscreen extent -3.37,-3.78 3.38,3.77
hc-49sm [mm]
  rrect30% 6x2 smd: 1(-4.5,0) 2(4.5,0)
  silkscreen extent -5.7,-2.4 5.7,2.4
HEADER_2x3 [mm]
  rect 1.5x1.5 / inner round 1.5 / far side round 1.5 hole 1: 1(-1.33,2.955)
  round 1.5 hole 1: 2(1.21,2.955) 3(-1.33,0.415) 4(1.21,0.415) 5(-1.33,-2.125) 6(1.21,-2.125)
  silkscreen extent -2.34,-3.31 2.3,4.07
HSOIC-8-DDA [mm] "HSIOC8 with thermal pad"
  rrect8% 0.45x2.15 smd: 1(-1.905,-2.875) 2(-0.635,-2.875) 3(0.635,-2.875) 4(1.905,-2.875) 5(1.905,2.875) 6(0.635,2.875) 7(-0.635,2.875) 8(-1.905,2.875)
  rrect1% 3.1x2.4 smd: 9(0,0)
  round 0.33 on Mech2: 16(0,0.65) 17(0,-0.65) 18(-1.3,-0.65) 18(1.3,-0.65) 19(-1.3,0.65) 19(1.3,0.65)
  silkscreen extent -2.35,-4.21 2.48,4.21
LQFP-64_10x10_P0.5 [mm] "TSQFP, 64-Leads, Body 10,00x10,00mm, Pitch 0,50mm, IPC Medium Density"
  oval 0.3x1.4 smd: 1(-3.75,-5.7) 2(-3.25,-5.7) 3(-2.75,-5.7) 4(-2.25,-5.7) 5(-1.75,-5.7) 6(-1.25,-5.7) 7(-0.75,-5.7) 8(-0.25,-5.7) 9(0.25,-5.7) 10(0.75,-5.7) 11(1.25,-5.7) 12(1.75,-5.7) 13(2.25,-5.7) 14(2.75,-5.7) 15(3.25,-5.7) 16(3.75,-5.7) 33(3.75,5.7) 34(3.25,5.7) 35(2.75,5.7) 36(2.25,5.7) 37(1.75,5.7) 38(1.25,5.7) 39(0.75,5.7) 40(0.25,5.7) 41(-0.25,5.7) 42(-0.75,5.7) 43(-1.25,5.7) 44(-1.75,5.7) 45(-2.25,5.7) 46(-2.75,5.7) 47(-3.25,5.7) 48(-3.75,5.7)
  oval 1.4x0.3 smd: 17(5.7,-3.75) 18(5.7,-3.25) 19(5.7,-2.75) 20(5.7,-2.25) 21(5.7,-1.75) 22(5.7,-1.25) 23(5.7,-0.75) 24(5.7,-0.25) 25(5.7,0.25) 26(5.7,0.75) 27(5.7,1.25) 28(5.7,1.75) 29(5.7,2.25) 30(5.7,2.75) 31(5.7,3.25) 32(5.7,3.75) 49(-5.7,3.75) 50(-5.7,3.25) 51(-5.7,2.75) 52(-5.7,2.25) 53(-5.7,1.75) 54(-5.7,1.25) 55(-5.7,0.75) 56(-5.7,0.25) 57(-5.7,-0.25) 58(-5.7,-0.75) 59(-5.7,-1.25) 60(-5.7,-1.75) 61(-5.7,-2.25) 62(-5.7,-2.75) 63(-5.7,-3.25) 64(-5.7,-3.75)
  silkscreen extent -4.6,-5.82 4.6,4.6, body extent -5,-5 5,5, height 1.6
MALE_PCI_x8 [mm]
  rrect10% 0.7x4.1 smd far side: A1(-14.65,2.75) A2(-13.65,2.75) A3(-12.65,2.75) A4(-11.65,2.75) A5(-10.65,2.75) A6(-9.65,2.75) A7(-8.65,2.75) A8(-7.65,2.75) A9(-6.65,2.75) A10(-5.65,2.75) A11(-4.65,2.75) A12(-1.65,2.75) A13(-0.65,2.75) A14(0.35,2.75) A15(1.35,2.75) A16(2.35,2.75) A17(3.35,2.75) A18(4.35,2.75) A19(5.35,2.75) A20(6.35,2.75) A21(7.35,2.75) A22(8.35,2.75) A23(9.35,2.75) A24(10.35,2.75) A25(11.35,2.75) A26(12.35,2.75) A27(13.35,2.75) A28(14.35,2.75) A29(15.35,2.75) A30(16.35,2.75) A31(17.35,2.75) A32(18.35,2.75) A33(19.35,2.75) A34(20.35,2.75) A35(21.35,2.75) A36(22.35,2.75) A37(23.35,2.75) A38(24.35,2.75) A39(25.35,2.75) A40(26.35,2.75) A41(27.35,2.75) A42(28.35,2.75) A43(29.35,2.75) A44(30.35,2.75) A45(31.35,2.75) A46(32.35,2.75) A47(33.35,2.75) A48(34.35,2.75) A49(35.35,2.75)
  rrect10% 0.7x4.1 smd: B1(-14.65,2.75) B2(-13.65,2.75) B3(-12.65,2.75) B4(-11.65,2.75) B5(-10.65,2.75) B6(-9.65,2.75) B7(-8.65,2.75) B8(-7.65,2.75) B9(-6.65,2.75) B10(-5.65,2.75) B11(-4.65,2.75) B12(-1.65,2.75) B13(-0.65,2.75) B14(0.35,2.75) B15(1.35,2.75) B16(2.35,2.75) B17(3.35,2.75) B18(4.35,2.75) B19(5.35,2.75) B20(6.35,2.75) B21(7.35,2.75) B22(8.35,2.75) B23(9.35,2.75) B24(10.35,2.75) B25(11.35,2.75) B26(12.35,2.75) B27(13.35,2.75) B28(14.35,2.75) B29(15.35,2.75) B30(16.35,2.75) B31(17.35,2.75) B32(18.35,2.75) B33(19.35,2.75) B34(20.35,2.75) B35(21.35,2.75) B36(22.35,2.75) B37(23.35,2.75) B38(24.35,2.75) B39(25.35,2.75) B40(26.35,2.75) B41(27.35,2.75) B42(28.35,2.75) B43(29.35,2.75) B44(30.35,2.75) B45(31.35,2.75) B46(32.35,2.75) B47(33.35,2.75) B48(34.35,2.75) B49(35.35,2.75)
MWSA0603S-4R7MT [mm] "SMD,7x6.6mm"
  rrect10% 2.35x3.43 smd: 1(-3.1,0) 2(3.1,0)
  silkscreen extent -4.62,-4.2 4.73,4.3
SMB [mm]
  rrect22% 1.8x2.5 smd: 1(-1.95,0) 2(1.95,0)
  silkscreen extent -3.3,-1.6 3.4,1.6
SOIC-8 [mm]
  rrect0% 1.55x0.6 smd: 1(-2.75,1.925) 2(-2.75,0.65) 3(-2.75,-0.625) 4(-2.75,-1.9) 5(2.725,-1.9) 6(2.725,-0.625) 7(2.725,0.65) 8(2.725,1.925)
  silkscreen extent -3.88,-2.55 3.87,2.55
SOT-223 [mm]
  rrect4% 0.95x2.15 smd: 1(-2.3,-2.9) 2(0,-2.9) 3(2.3,-2.9)
  rrect1% 3.25x2.15 smd: 4(0,2.9)
  Top Layer 1 region: -2.775,-3.975 -1.825,-3.975 -1.825,-1.825 -2.775,-1.825
  Top Layer 1 region: 1.825,-3.975 2.775,-3.975 2.775,-1.825 1.825,-1.825
  Top Layer 1 region: -0.475,-3.975 0.475,-3.975 0.475,-1.825 -0.475,-1.825
  silkscreen extent -3.25,-4.18 3.22,4.22
SuperSO8 [mm]
  rrect8% 0.5x0.925 smd paste-2539.97: 1(-1.905,-2.928) 2(-0.635,-2.93) 3(0.635,-2.93) 4(1.905,-2.93)
  rrect6% 0.6x0.8 smd paste-2539.97: 5(-1.905,2.86) 6(-0.635,2.86) 7(0.635,2.86) 8(1.905,2.86)
  rrect1% 4.41x3.655 smd paste-2539.97: 5(0,0.695)
TO-263-3 [mm] "DPAK 3 leg and pad"
  rrect2% 1.5x4.5 smd: 1(-2.54,-5) 2(0,-5) 3(2.54,-5)
  rrect2% 1.5x9.5 smd: 4(-4.1,5) 4(-2,5) 4(0,5) 4(2,5) 4(4.1,5)
  silkscreen extent -5.48,-7.66 5.54,10.38

## Part data
C1_Axis1 C2_Axis1 C3_Axis1 C9_Axis1 C33_Axis1 C49_Axis1: "2.2u-10u"
C4_Axis1 C5_Axis1 C6_Axis1 C11_Axis1 C12_Axis1 C13_Axis1 C15_Axis1 C16_Axis1 C17_Axis1 C19_Axis1 C20_Axis1 C23_Axis1 C24_Axis1 C25_Axis1 C26_Axis1 C28_Axis1 C29_Axis1 C36_Axis1 C37_Axis1 C39_Axis1 C41_Axis1 C45_Axis1 C46_Axis1 C52_Axis1 C53_Axis1 C55_Axis1 C56_Axis1 C57_Axis1 C58_Axis1 C59_Axis1 C60_Axis1 C61_Axis1: "0.1u-1u"
C7_Axis1 C18_Axis1 C31_Axis1 C38_Axis1 C47_Axis1 C54_Axis1: library part "Capacitor 0805", "0.1u-1u"
C8_Axis1 C32_Axis1 C48_Axis1: library part "Capacitor 1206", "2.2u-10u"
C10_Axis1 C14_Axis1 C34_Axis1 C35_Axis1 C50_Axis1 C51_Axis1: library part "RVT1H470M0607 47UF 50V", "D6.3xL7.7mm Aluminum Electrolytic Capacitors - SMD-55℃~+105℃ 2800hrs@105℃ 47uF 50V 6.3mm 66mA@120Hz 7.7mm ±20% SMD, ROHS"
C21_Axis1 C22_Axis1 C27_Axis1 C30_Axis1 C40_Axis1 C42_Axis1 C43_Axis1 C44_Axis1: library part "Capacitor 0805"
  C21_Axis1 C40_Axis1: Parameter 1=100n
  C22_Axis1 C30_Axis1 C44_Axis1: Parameter 1=33p
  C27_Axis1 C43_Axis1: Parameter 1=10p
C_BULK1_Axis1 C_BULK2_Axis1 C_BULK3_Axis1: library part "220uF 100V 12.5mm 16.5mm", "100V 12.5mm 16.5mm 220uF ±20% SMD,D12.5xL16.5mm Aluminum Electrolytic Capacitors - SMD ROHS"
D2_Axis1 D3_Axis1 D4_Axis1 D7_Axis1 D8_Axis1: library part "Suppressor Dual", "Suppressor Dual"
FB1_Axis1 FB2_Axis1 FB3_Axis1 FB4_Axis1 FB5_Axis1 FB6_Axis1: "600 ohm 100Mhz"
J1_Axis1: "3 pin power"
J2_Axis1 J3_Axis1: "8 pin JST"
J4_Axis1: library part CONN_EDGE_PCIe_x8_98P
M1_Axis1 M2_Axis1 M3_Axis1 M4_Axis1 M5_Axis1 M6_Axis1: library part BSC030N08NS5
R25_Axis1 R26_Axis1 R34_Axis1 R35_Axis1 R48_Axis1 R49_Axis1 R50_Axis1 R51_Axis1 R52_Axis1 R53_Axis1: library part "Resistor 0805"
U1_Axis1 U6_Axis1 U10_Axis1: "Step down DC/DC"
U2_Axis1 U3_Axis1 U4_Axis1: "-40℃~+150℃@(Tj) 120uA 170ns 170ns 18ns 2 22ns 4A 4A 5V~20V IGBT Low and high Side Under Voltage Protection SOIC-8 Gate Drivers ROHS"
U5_Axis1 U9_Axis1: "Amplifier. A1=20 V/V and +-6.75 Mohm for shunt"
U7_Axis1: library part TLV1117-33IDCYR, "LDO 3.3V"
U8_Axis1: "STM32 with ADC"
U11_Axis1: "Output Current up to 1A"
U12_Axis1 U13_Axis1 U14_Axis1 U15_Axis1 U16_Axis1 U17_Axis1: "20 Mbps RS-422/485"
Y1_Axis1: library part Crystal

## Via types
v1: diameter 0.6/0.6 (per signal layer), hole 0.3, Top Layer 1 to Bottom Layer 1, 1674 vias

## Nets (pads, with @x,y where several pads share a name; then routed paths per layer and width w, separated by ;. In a path a pad name is that pad's centre, name@x,y a point inside that pad or via, vN(x,y) a via of type N, cw(c..) or ccw(c..) an arc to the next point about the centre after c; other vN are vias at no path point)
+3.3: C23_Axis1.2 C25_Axis1.2 C28_Axis1.2 C37_Axis1.2 FB4_Axis1.2 FB5_Axis1.2 FB6_Axis1.1 J_SWD_Axis1.1 R28_Axis1.2 U5_Axis1.3 U7_Axis1.2 U7_Axis1.4 U8_Axis1.1 U8_Axis1.32 U8_Axis1.48 U8_Axis1.64 U9_Axis1.3 U12_Axis1.8 U13_Axis1.8 U14_Axis1.8 U15_Axis1.8 U16_Axis1.8 U17_Axis1.8 | length 18.6
  Top Layer 1 w0.8: U5_Axis1.3@57.863,53.621 58.98,53.621 59.448,53.152 FB4_Axis1.2@59.448,50.22 59.448,50.2 59.348,50.1 v1(58.1,50.1) ; v1(60.243,44.795) 60.243,44.545 61.3,43.489 61.3,42.1 ; FB5_Axis1.2@69.315,56.402 v1(69.315,57.651) ; FB5_Axis1.2@69.435,56.302 72.368,56.302 72.836,56.771 U9_Axis1.3@72.836,57.887 ; 71.385,40.791 71.385,41.678 73.003,43.295 v1(73.253,43.295)
  other v1: 91.965,23.021 91.995,28.884 57.381,31.044 92.135,34.76 75.807,43.262 92.154,44.052 45.1,47.7 46,47.7 46.8,47.7 45.1,48.6 46,48.6 46.8,48.6 47.6,48.6 45.1,49.5 46,49.5 46.8,49.5 47.6,49.5 92.154,49.66 45.1,50.3 46,50.3 46.8,50.3 47.6,50.3 45.1,51.2 46,51.2 46.8,51.2 92.154,55.268
+5: C53_Axis1.2 J2_Axis1.2 J3_Axis1.2 U11_Axis1.3
  other v1: 28.4,30.4 29.6,30.9 27.3,31.1 28.4,31.3 29.6,31.6 27.3,31.9 28.4,32.1 29.6,32.2 27.3,32.7 29.6,32.9 28.4,33 27.3,33.6 29.6,33.7 28.4,33.9 27.3,34.4 29.6,34.5 28.4,34.8 27.3,35.3 27.3,36.3 28.753,36.872 27.3,37.2
+12: C10_Axis1.1 C14_Axis1.1 D8_Axis1.2 FB1_Axis1.2 FB2_Axis1.2 FB3_Axis1.2 L1_Axis1.2 R8_Axis1.1
  other v1: 75.024,77.2 52.913,77.349 97.803,77.874 75.5,78.4 53.389,78.55 97.2,79.3 98.3,79.3 75.5,79.4 53.389,79.55 75.5,80.5 53.389,80.65 25.2,83.5 26.1,83.5 25.2,84.4 26.1,84.4 25.2,85.3 26.1,85.3 25.2,86.2 26.1,86.2 20.8,91.8 21.8,91.8 22.8,91.8
A1_Axis1: C56_Axis1.2 J4_Axis1.A44 R42_Axis1.2 | length 34.6
  Bottom Layer 1 w0.5: 83,7.5 83,39.7 84.5,41.2 C56_Axis1.2@84.5,41.446
A1_Axis1_N: J2_Axis1.4 R48_Axis1.2 U12_Axis1.7 | length 6.7
  Bottom Layer 1 w0.3: v1(92.154,42.777) 92.154,42.715 92.479,42.389 92.728,42.389 92.869,42.53 92.997,42.53 93.576,43.109 93.576,43.433 93.926,43.783 R48_Axis1.2@94.1,43.783 94.274,43.783 94.624,43.433 94.624,43.109 94.8,42.933 95.054,42.933 96.051,43.93 96.051,44.451 J2_Axis1.4@96.3,44.699
A1_Axis1_P: J2_Axis1.3 R48_Axis1.1 U12_Axis1.6 | length 5.2
  Bottom Layer 1 w0.3: v1(92.154,41.502) 92.154,41.564 92.479,41.889 92.935,41.889 93.076,42.03 93.403,42.03 93.85,41.583 R48_Axis1.1@94.1,41.583 94.274,41.583 94.624,41.933 94.624,42.258 94.8,42.433 96.066,42.433 J2_Axis1.3@96.3,42.199
A1_Axis2: 
A1_Axis2_N: 
A1_Axis2_P: 
A1_Axis3: 
A1_Axis3_N: 
A1_Axis3_P: 
A1_Axis4: 
A1_Axis4_N: 
A1_Axis4_P: 
A1_Axis5: 
A1_Axis5_N: 
A1_Axis5_P: 
A1_Axis6: 
A1_Axis6_N: 
A1_Axis6_P: 
A2_Axis1: C59_Axis1.2 J4_Axis1.A47 R45_Axis1.2 | length 13.9
  Bottom Layer 1 w0.5: C59_Axis1.2@84.266,20.187 C59_Axis1.2@84.266,20.437 84.414,20.289 84.414,19.286 86,17.7 86,7.5
A2_Axis1_N: J3_Axis1.4 R51_Axis1.2 U15_Axis1.7 | length 5.3
  Bottom Layer 1 w0.3: v1(91.965,21.746) 92.889,22.67 93.77,22.67 R51_Axis1.2@94.1,23 94.35,23 95.293,23.943 96.051,23.943 J3_Axis1.4@96.3,24.191
A2_Axis1_P: J3_Axis1.3 R51_Axis1.1 U15_Axis1.6 | length 4.8
  Bottom Layer 1 w0.3: v1(91.965,20.471) 93.771,20.471 R51_Axis1.1@94.1,20.8 94.43,21.13 95.387,21.13 95.948,21.691 J3_Axis1.3@96.3,21.691
A2_Axis2: 
A2_Axis2_N: 
A2_Axis2_P: 
A2_Axis3: 
A2_Axis3_N: 
A2_Axis3_P: 
A2_Axis4: 
A2_Axis4_N: 
A2_Axis4_P: 
A2_Axis5: 
A2_Axis5_N: 
A2_Axis5_P: 
A2_Axis6: 
A2_Axis6_N: 
A2_Axis6_P: 
AGND: C20_Axis1.2 C21_Axis1.2 C22_Axis1.2 C24_Axis1.1 C26_Axis1.2 C29_Axis1.2 C30_Axis1.1 C40_Axis1.2 C42_Axis1.2 C44_Axis1.1 U5_Axis1.2 U5_Axis1.7 U8_Axis1.27 U9_Axis1.2 U9_Axis1.7 | length 0.3
  Top Layer 1 w0.254: U8_Axis1.27@71.043,38.045 U8_Axis1.27@71.052,38.036 ; C26_Axis1.2@73.003,36.885 C26_Axis1.2@73.253,36.885 C26_Axis1.2@73.257,36.881 ; C29_Axis1.2@80.91,36.881 C29_Axis1.2@80.915,36.876
"AMP1 IN_Axis1_N": M5_Axis1.1 M5_Axis1.2 M5_Axis1.3 R13_Axis1.1 R20_Axis1.1 R23_Axis1.2 R26_Axis1.1 | length 10.7
  Top Layer 1 w0.3: R26_Axis1.1@57.321,60.126 57.322,60.128 60.138,60.128 60.314,60.303 60.314,65.113 60.38,65.179 60.38,65.558 60.204,65.734 R23_Axis1.2@58.127,65.734
  other v1: 59.927,68.979